# Altium PCB 多款天线pcb.PcbDoc
Units mil, origin at the board's own origin, x right, y up, seen from the top; angles counter-clockwise.
Board outline 6000 x 4000 mil, 4 copper layers (Top Layer, Mid-Layer 1, Mid-Layer 2, Bottom Layer); 18 components, 0 nets, 39 pads, 60 vias.
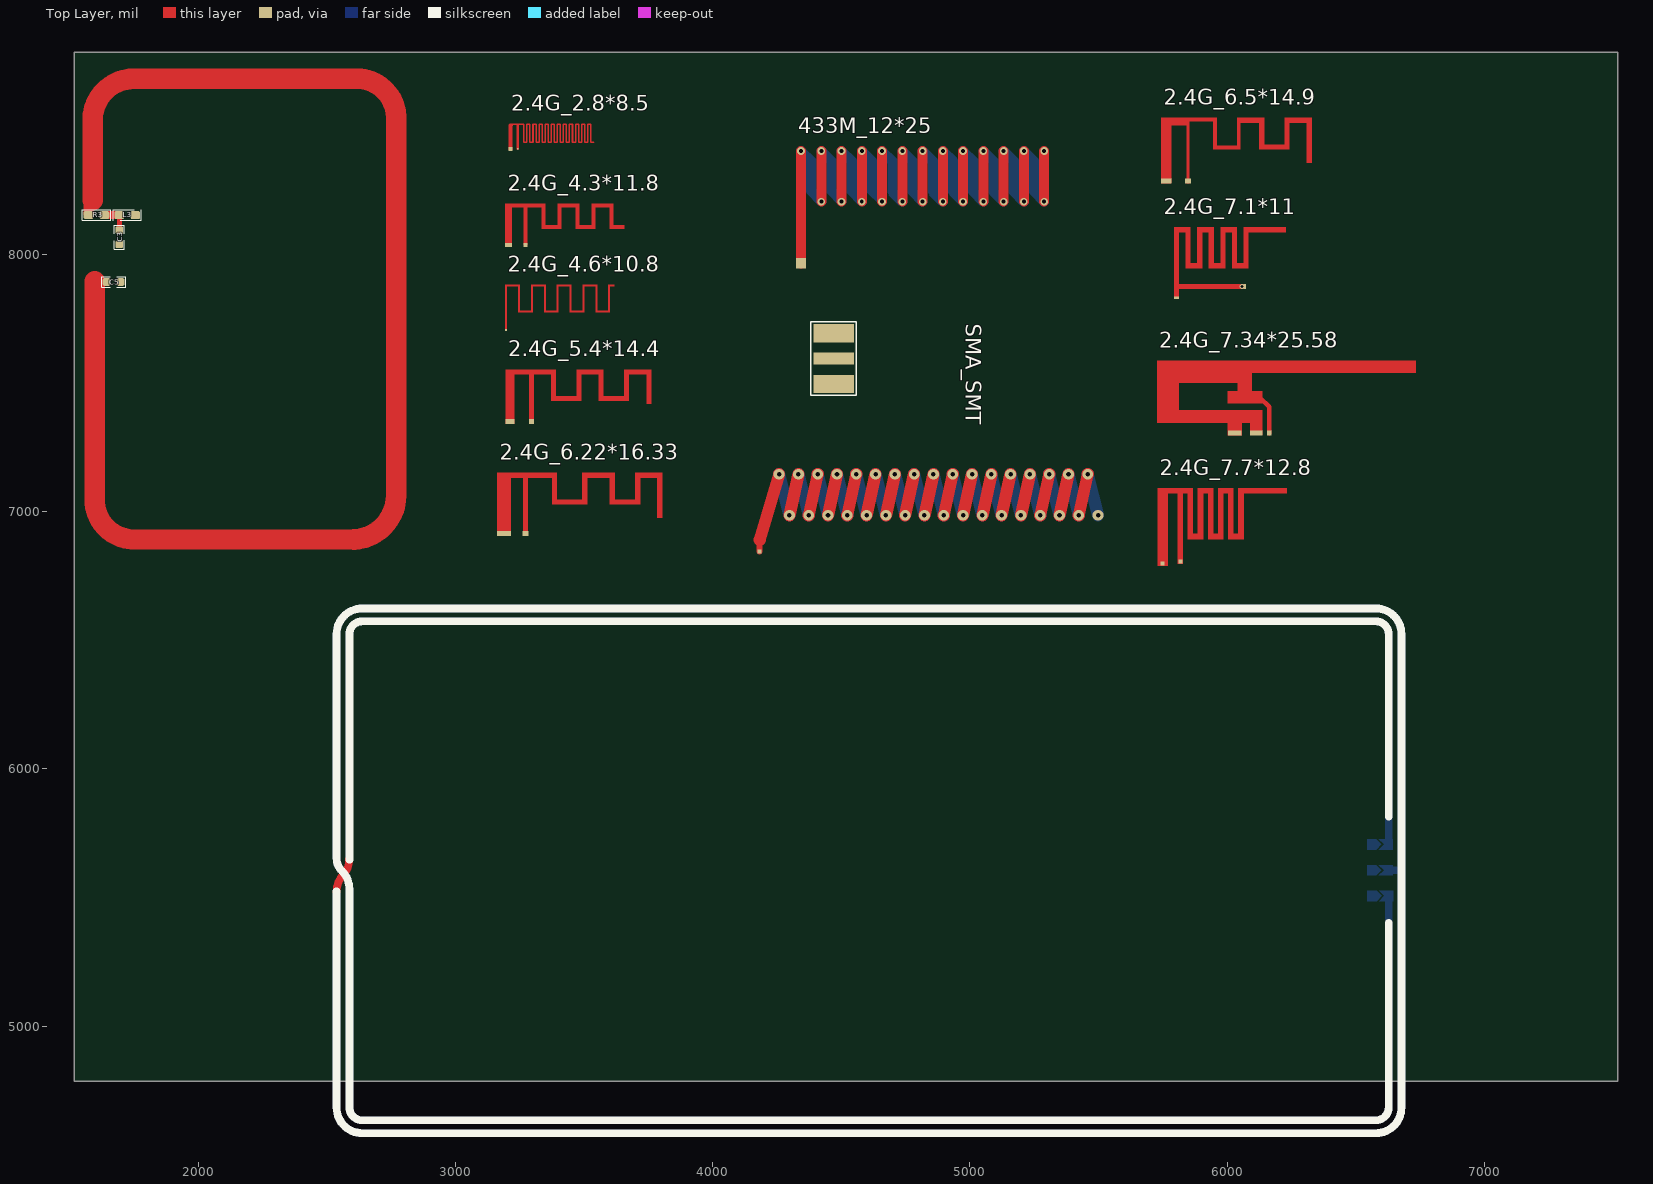
[diagram p0: Top Layer view]
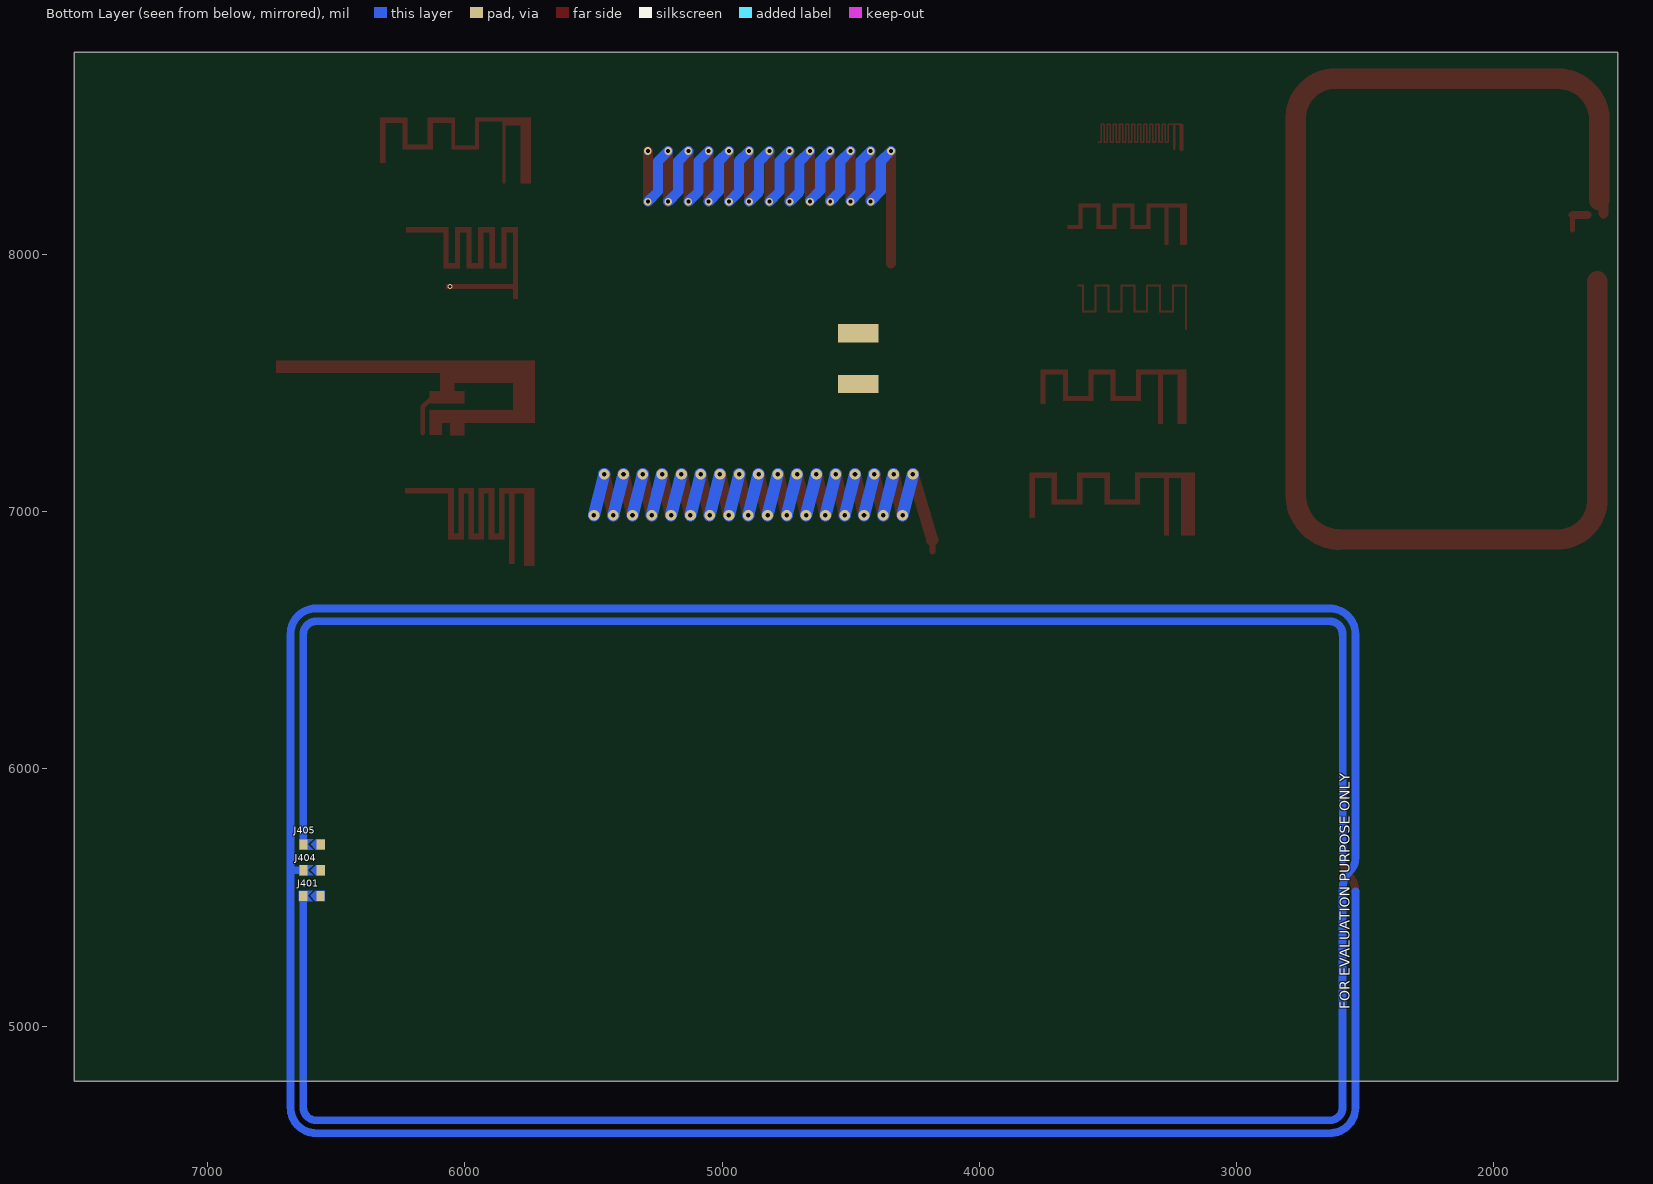
[diagram p1: Bottom Layer view, seen from below]

## Layer stack, top to bottom
Top Layer: signal copper 1.4
Dielectric: dielectric 12.6, FR-4, Dk 4.8
Mid-Layer 1: signal copper 1.4
Dielectric: dielectric 12.6, FR-4, Dk 4.8
Mid-Layer 2: signal copper 1.4
Dielectric: dielectric 12.6, FR-4, Dk 4.8
Bottom Layer: signal copper 1.4

## Board outline
1518.27,4785.59 7518.27,4785.59 7518.27,8785.59 1518.27,8785.59

## Design rules (kind name [scope] priority, off if disabled: settings)
Clearance [All] p1: gap=10
PolygonConnect [All] p1: connectstyle=Relief reliefconductorwidth=10 reliefentries=4 polygonreliefangle="90 Angle" airgapwidth=10
RoutingVias [All] p1: holewidth=28 width=50 viastyle="Through Hole" minholewidth=28 minwidth=50 maxholewidth=28 maxwidth=50
SolderMaskExpansion [All] p1: expansion=4
Width [All] p1: maxlimit=10 minlimit=10 preferedwidth=10
28 further rules are at their usual default settings.

## Components (designator, comment, footprint, x,y, rotation, side; value= is the part's Value field where it differs from the comment)
2.4G_2.8*8.5 "Comment" 2.4G_2.8x8.5 3242.4,8410.59 r0 top
2.4G_4.3*11.8 "Comment" 2.4G_4.3x11.8(TEST) 3272.4,8035.59 r0 top
2.4G_4.6*10.8 "Comment" 2.4G_4.6X10.8(TEST) 3197.4,7705.59 r0 top
2.4G_5.4*14.4 "Comment" 2.4G_5.4X14.4 3212.4,7350.59 r0 top
2.4G_6.5*14.9 "Comment" 2.4G_6.5X14.9 5763.27,8285.59 r0 top
2.4G_6.22*16.33 "Comment" 2.4G_6.22X16.33 3272.4,6915.59 r0 top
2.4G_7.1*11 "Comment" 2.4G_7.1X11 5803.27,7830.59 r0 top
2.4G_7.7*12.8 "Comment" 2.4G_7.7X12.8 5818.27,6805.59 r0 top
2.4G_7.34*25.58 "Comment" 2.4G_7.34X25.58 6163.27,7305.59 r0 top
433M_12*25 "Comment" 433M_12X25 4343.27,7965.59 r0 top
C3 "NC" 0603C 1693.27,8066.59 r270 top
C5 "NC" 0603C 1671.27,7892.59 r0 top
J401 "closed 0R" JP2_SMD_CLOSED 6594.75,5506 r0 bottom net-tie
J404 "closed 0R" JP2_SMD_CLOSED 6594,5606 r0 bottom net-tie
J405 "closed 0R" JP2_SMD_CLOSED 6593.75,5706 r0 bottom net-tie
L3 "4.7nH" 0603L 1724.27,8152.59 r0 top
R3 "10R" 0603R 1604.27,8152.59 r0 top
SMA_SMT "Comment" SMA-SMD 4470,7595 r270 top

## Footprints (in the part's own frame and the unit in brackets; to place one, negate y for a bottom-side part, rotate by r counter-clockwise, add the part's x,y. Pads: shape width x height; smd on the part's side, far side on the other; paste and mask are expansions set on the pad)
2.4G_2.8x8.5 [mm]
  rect 0.15x0.15 smd paste-1: 1(0,0)
  rect 0.4x0.4 smd paste-1: 2(-0.7,-0.03)
  Top Layer region: -0.501,2.401 -0.553,2.401 -0.553,2.257 -0.501,2.257
  Top Layer lines w0.15: -0.7,2.42 0,2.42 0.6,2.42 0.6,0.62 0.9,0.62 0.9,2.42 1.2,2.42 1.2,0.62 1.5,0.62 1.5,2.42 1.8,2.42 1.8,0.62 2.1,0.62 2.1,2.42 2.4,2.42 2.4,0.62 2.7,0.62 2.7,2.42 3,2.42 3,0.62 3.3,0.62 3.3,2.42 3.6,2.42 3.6,0.62 3.9,0.62 3.9,2.42 4.2,2.42 4.2,0.62 4.5,0.62 4.5,2.42 4.8,2.42 4.8,0.62 5.1,0.62 5.1,2.42 5.4,2.42 5.4,0.62 5.7,0.62 5.7,2.42 6,2.42 6,0.62 6.3,0.62 6.3,2.42 6.6,2.42 6.6,0.62 6.9,0.62 6.9,2.42 7.2,2.42 7.2,0.62 7.5,0.62
  Top Layer lines w0.25: 0,0 0,0.145 0,0.423 0,2.37
  Top Layer lines w0.4: -0.7,-0.03 -0.7,2.295
2.4G_4.3x11.8(TEST) [mm]
  rect 0.4x0.4 smd paste-2: 1(0,0)
  rect 0.72x0.4 smd paste-2: 2(-1.68,0)
  Top Layer region: 8.28,1.608 9.751,1.608 9.751,2.008 8.28,2.008
  Top Layer region: 3.16,3.72 5.32,3.72 5.32,4.12 3.16,4.12
  Top Layer region: 3.16,1.608 3.56,1.608 3.56,4.12 3.16,4.12
  Top Layer region: 1.56,1.608 3.56,1.608 3.56,2.008 1.56,2.008
  Top Layer region: -0.2,0 0.2,0 0.2,3.92 -0.2,3.92
  Top Layer region: -2.04,3.72 1.96,3.72 1.96,4.12 -2.04,4.12
  Top Layer region: -2.04,0 -1.32,0 -1.32,3.72 -2.04,3.72
  Top Layer region: 1.56,1.608 1.96,1.608 1.96,4.12 1.56,4.12
  Top Layer region: 4.92,1.608 5.32,1.608 5.32,4.12 4.92,4.12
  Top Layer region: 4.92,1.608 6.92,1.608 6.92,2.008 4.92,2.008
  Top Layer region: 6.52,1.608 6.92,1.608 6.92,4.12 6.52,4.12
  Top Layer region: 6.52,3.72 8.68,3.72 8.68,4.12 6.52,4.12
  Top Layer region: 8.28,1.608 8.68,1.608 8.68,4.12 8.28,4.12
2.4G_4.6X10.8(TEST) [mm]
  rect 0.2x0.2 smd paste-2: 1(0,0)
  Top Layer region: 0.101,0 0.101,4.5 -0.099,4.5 -0.099,0
  Top Layer region: -0.099,4.3 1.371,4.3 1.371,4.5 -0.099,4.5
  Top Layer region: 1.371,1.72 1.371,4.5 1.171,4.5 1.171,1.72
  Top Layer region: 1.171,1.72 2.641,1.72 2.641,1.92 1.171,1.92
  Top Layer region: 2.641,1.72 2.641,4.5 2.441,4.5 2.441,1.72
  Top Layer region: 2.441,4.3 3.911,4.3 3.911,4.5 2.441,4.5
  Top Layer region: 3.911,1.72 3.911,4.5 3.711,4.5 3.711,1.72
  Top Layer region: 3.711,1.72 5.181,1.72 5.181,1.92 3.711,1.92
  Top Layer region: 5.181,1.72 5.181,4.5 4.981,4.5 4.981,1.72
  Top Layer region: 4.981,4.3 6.451,4.3 6.451,4.5 4.981,4.5
  Top Layer region: 6.451,1.72 6.451,4.5 6.251,4.5 6.251,1.72
  Top Layer region: 6.251,1.72 7.721,1.72 7.721,1.92 6.251,1.92
  Top Layer region: 7.721,1.72 7.721,4.5 7.521,4.5 7.521,1.72
  Top Layer region: 7.521,4.3 8.991,4.3 8.991,4.5 7.521,4.5
  Top Layer region: 8.991,1.72 8.991,4.5 8.791,4.5 8.791,1.72
  Top Layer region: 8.791,1.72 10.261,1.72 10.261,1.92 8.791,1.92
  Top Layer region: 10.261,1.72 10.261,4.5 10.061,4.5 10.061,1.72
  Top Layer region: 10.061,4.3 10.698,4.3 10.698,4.5 10.061,4.5
2.4G_5.4X14.4 [mm]
  rect 0.5x0.5 smd paste-2: 1(2.097,-0.004)
  rect 0.9x0.5 smd paste-2: 2(0,0)
  Top Layer region: -0.452,4.651 4.547,4.651 4.547,5.151 -0.452,5.151
  Top Layer region: 1.847,-0.25 2.347,-0.25 2.347,5.076 1.847,5.076
  Top Layer region: 4.047,2.01 4.547,2.01 4.547,5.076 4.047,5.076
  Top Layer region: 4.128,2.01 6.922,2.01 6.922,2.51 4.128,2.51
  Top Layer region: 6.547,2.01 7.047,2.01 7.047,5.076 6.547,5.076
  Top Layer region: 6.547,4.651 9.247,4.651 9.247,5.151 6.547,5.151
  Top Layer region: 8.747,2.01 9.247,2.01 9.247,5.076 8.747,5.076
  Top Layer region: 8.827,2.01 11.621,2.01 11.621,2.51 8.827,2.51
  Top Layer region: 11.247,2.01 11.747,2.01 11.747,5.076 11.247,5.076
  Top Layer region: 11.247,4.651 13.947,4.651 13.947,5.151 11.247,5.151
  Top Layer region: 13.447,1.71 13.947,1.71 13.947,5.076 13.447,5.076
  Top Layer region: -0.452,-0.25 0.448,-0.25 0.448,5.076 -0.452,5.076
2.4G_6.5X14.9 [mm]
  rect 0.6x0.5 smd paste-2: 1(2.127,0)
  rect 1.017x0.5 smd paste-2: 2(0,0)
  Top Layer region: 11.665,5.729 14.39,5.729 14.39,6.255 11.665,6.255
  Top Layer region: 11.665,3.09 12.188,3.09 12.188,6.255 11.665,6.255
  Top Layer region: 6.969,5.729 9.689,5.729 9.689,6.255 6.969,6.255
  Top Layer region: 6.969,3.09 7.324,3.09 7.324,6.255 6.969,6.255
  Top Layer region: 4.99,3.09 7.324,3.09 7.324,3.515 4.99,3.515
  Top Layer region: -0.508,-0.252 0.508,-0.252 0.508,6.255 -0.508,6.255
  Top Layer region: 1.975,-0.245 2.28,-0.245 2.28,6.255 1.975,6.255
  Top Layer region: -0.508,5.447 2.28,5.447 2.28,6.255 -0.508,6.255
  Top Layer region: 2.28,5.875 4.99,5.875 4.99,6.255 2.28,6.255
  Top Layer region: 4.635,3.09 4.99,3.09 4.99,6.255 4.635,6.255
  Top Layer region: 9.163,3.09 9.689,3.09 9.689,6.255 9.163,6.255
  Top Layer region: 9.163,3.09 12.188,3.09 12.188,3.616 9.163,3.616
  Top Layer region: 13.865,1.79 14.39,1.79 14.39,6.255 13.865,6.255
2.4G_6.22X16.33 [mm]
  rect 0.6x0.5 smd paste-2: 1(0,0)
  rect 1.354x0.5 smd paste-2: 2(-2.117,0)
  Top Layer region: 13.007,1.535 13.533,1.535 13.533,6.001 13.007,6.001
  Top Layer region: 10.808,5.475 13.533,5.475 13.533,6.001 10.808,6.001
  Top Layer region: 10.808,2.836 11.331,2.836 11.331,6.001 10.808,6.001
  Top Layer region: 8.306,2.836 11.331,2.836 11.331,3.362 8.306,3.362
  Top Layer region: 8.306,2.836 8.832,2.836 8.832,6.001 8.306,6.001
  Top Layer region: 5.598,5.475 8.832,5.475 8.832,6.001 5.598,6.001
  Top Layer region: 5.598,2.836 6.124,2.836 6.124,6.001 5.598,6.001
  Top Layer region: 2.591,2.836 6.124,2.836 6.124,3.362 2.591,3.362
  Top Layer region: 2.591,2.836 3.117,2.836 3.117,6.001 2.591,6.001
  Top Layer region: 0.225,5.475 3.117,5.475 3.117,6.001 0.225,6.001
  Top Layer region: -2.794,5.475 -0.006,5.475 -0.006,6.001 -2.794,6.001
  Top Layer region: -2.794,-0.219 -1.44,-0.219 -1.44,6.001 -2.794,6.001
  Top Layer region: -0.225,-0.238 0.225,-0.238 0.225,6.001 -0.225,6.001
2.4G_7.1X11 [mil]
  rect 20x10 smd paste-20 mask+2: 1(0,0)
  rect 10x20 smd paste-20 mask+2: 2(265,45)
  Top Layer region: -10,35 270,35 270,55 -10,55
  Top Layer region: 260,255 425,255 425,275 260,275
  Top Layer region: 260,115 280,115 280,275 260,275
  Top Layer region: 215,115 235,115 235,275 215,275
  Top Layer region: 215,115 280,115 280,135 215,135
  Top Layer region: 125,115 190,115 190,135 125,135
  Top Layer region: 85,255 145,255 145,275 85,275
  Top Layer region: 125,115 145,115 145,275 125,275
  Top Layer region: 170,115 190,115 190,275 170,275
  Top Layer region: 170,255 235,255 235,275 170,275
  Top Layer region: 80,115 100,115 100,275 80,275
  Top Layer region: 35,115 100,115 100,135 35,135
  Top Layer region: 35,115 55,115 55,265 35,265
  Top Layer region: -10,255 55,255 55,275 -10,275
  Top Layer region: -10,-5 10,-5 10,275 -10,275
2.4G_7.7X12.8 [mm]
  rect 0.4x0.4 smd paste-2: 1(0,0) 2(-1.759,-0.18)
  Top Layer region: -2.276,-0.435 -1.221,-0.435 -1.221,7.259 -2.276,7.259
  Top Layer region: -2.276,6.706 1.258,6.706 1.258,7.259 -2.276,7.259
  Top Layer region: -0.277,-0.245 0.277,-0.245 0.277,6.751 -0.277,6.751
  Top Layer region: 0.703,2.206 1.258,2.206 1.258,7.259 0.703,7.259
  Top Layer region: 0.703,2.206 2.258,2.206 2.258,2.761 0.703,2.761
  Top Layer region: 1.704,2.206 2.258,2.206 2.258,7.259 1.704,7.259
  Top Layer region: 1.704,6.704 3.259,6.704 3.259,7.259 1.704,7.259
  Top Layer region: 2.705,2.206 3.259,2.206 3.259,7.259 2.705,7.259
  Top Layer region: 2.705,2.206 4.257,2.206 4.257,2.761 2.705,2.761
  Top Layer region: 3.703,6.704 5.258,6.704 5.258,7.259 3.703,7.259
  Top Layer region: 4.704,2.206 5.258,2.206 5.258,7.259 4.704,7.259
  Top Layer region: 4.704,2.206 6.259,2.206 6.259,2.761 4.704,2.761
  Top Layer region: 5.705,2.206 6.259,2.206 6.259,7.259 5.705,7.259
  Top Layer region: 3.703,2.206 4.257,2.206 4.257,7.259 3.703,7.259
  Top Layer region: 5.705,6.704 10.529,6.704 10.529,7.259 5.705,7.259
2.4G_7.34X25.58 [mm]
  rect 0.46x0.46 smd paste-2: 1(0,0)
  rect 1.35x0.46 smd paste-2: 2(-3.4,0)
  rect 1.2x0.46 smd paste-2: 2(-1.28,0)
  Top Layer region: -4.11,2.92 -0.68,2.92 -0.68,4.13 -4.11,4.13
  Top Layer region: -11.09,0.97 -8.91,0.97 -8.91,7.14 -11.09,7.14
  Top Layer region: -1.882,-0.2 -0.68,-0.2 -0.68,1.827 -1.882,1.827
  Top Layer region: -4.11,-0.227 -2.683,-0.227 -2.683,1.722 -4.11,1.722
  Top Layer region: -11.09,0.97 -0.68,0.97 -0.68,2.26 -11.09,2.26
  Top Layer region: -11.09,4.93 -1.682,4.93 -1.682,7.14 -11.09,7.14
  Top Layer region: -3.11,3.989 -1.68,3.989 -1.68,6.884 -3.11,6.884
  Top Layer region: -11.09,5.93 14.49,5.93 14.49,7.14 -11.09,7.14
  Top Layer lines w0.46: -0.908,3.48 0,2.572 0,0
433M_12X25 [mm]
  rect 1x1 smd paste-2: 1(0,0)
  Top Layer lines w0.254: 0,11.074 0.008,11.082
  Top Layer lines w1: 0,0 0,11.074 ; 2.009,6.083 2.009,11.082 ; 4.008,6.083 4.008,11.082 ; 6.007,6.083 6.01,6.083 6.01,10.373 6.01,11.082 ; 8.009,6.083 8.009,11.082 ; 10.008,6.083 10.008,11.082 ; 12.009,6.083 12.009,11.082 ; 14.008,6.083 14.008,11.082 ; 16.007,6.083 16.007,11.082 ; 18.009,6.083 18.009,11.082 ; 20.008,6.083 20.008,11.082 ; 22.009,6.083 22.009,11.082 ; 24.008,6.083 24.008,11.082
  Bottom Layer lines w0.254: 1.875,6.083 2.009,6.083 ; 2.009,11.082 2.149,11.082 ; 3.919,6.083 4.008,6.083 ; 6.007,6.083 6.007,6.129 ; 8.009,6.083 8.009,6.19
  Bottom Layer lines w1: 0.008,11.082 1.008,10.081 ; 1.013,7.122 2.004,6.129 ; 1.016,7.122 1.016,10.081 ; 2.009,11.082 3.01,10.081 ; 3.015,7.122 4.006,6.129 ; 3.018,7.122 3.018,10.081 ; 4.008,11.082 5.009,10.081 5.016,10.081 5.016,7.122 6.007,6.129 ; 6.01,11.082 6.993,10.099 6.993,7.206 8.009,6.19 ; 8.009,11.082 9.022,10.069 9.022,7.069 10.008,6.083 ; 10.008,11.082 11.016,10.074 11.016,7.074 12.009,6.083 ; 12.009,11.082 13.018,10.071 13.018,7.071 14.008,6.083 ; 14.008,11.082 15.022,10.069 15.022,7.069 16.007,6.083 ; 16.007,11.082 17.008,10.084 17.008,7.082 18.009,6.083 ; 18.009,11.082 18.997,10.091 18.997,7.092 20.008,6.083 ; 20.008,11.082 21.011,10.081 21.011,7.079 22.009,6.083 ; 22.009,11.082 23.01,10.081 23.01,7.082 24.008,6.083
0603C [mil] "Capacitor"
  rrect50% 30x30 smd: 1(-27.5,0) 2(27.5,0)
  silkscreen extent -47,-20 47,20, body extent -35,-15 35,15, height 33
0603L [mm] "WE-CBF SMD EMI Suppression Ferrite Bead"
  rrect50% 0.96x0.8 smd: 1(-0.79,0) 2(0.79,0)
  silkscreen extent -1.4,-0.53 1.4,0.53, body extent -0.89,-0.38 0.89,0.38, height 0.8
0603R [mm]
  rrect50% 0.96x0.8 smd: 1(-0.79,0) 2(0.79,0)
  silkscreen extent -1.4,-0.53 1.4,0.53, body extent -0.89,-0.4 0.89,0.4, height 0.6
JP2_SMD_CLOSED [mil]
  rect 32x40 smd: 1(-33.75,0) 2(33.75,0)
  Top Layer region: -50,-20 -50,20 -14,20 6,0 -14,-20
  Top Layer region: -3.75,20 16.25,0 -3.75,-20 50,-20 50,20
SMA-SMD [mm]
  rect 1.2x4 smd paste-4: 1(0,0)
  rect 1.8x4 smd paste-4: 2(-2.5,0) 3(2.5,0)
  rect 1.8x4 smd far side paste-4: 4(-2.5,0) 5(2.5,0)
  silkscreen extent -3.63,-2.24 3.64,2.22, body extent -3.24,-1.72 3.26,11.78, height 3.75

## Part data
2.4G_2.8*8.5 2.4G_4.3*11.8 2.4G_4.6*10.8 2.4G_5.4*14.4 2.4G_6.5*14.9 2.4G_6.22*16.33 2.4G_7.1*11 2.4G_7.7*12.8 2.4G_7.34*25.58 433M_12*25 SMA_SMT: library part 1404000342
C3 C5: library part C
J401 J404 J405: library part solder_jumper_closed, "0R"
L3: library part L, "Inductor"
R3: library part R, "RES"

## Free pads (board coordinates)
  rect 15x15 smd: 1(4182.28,6844.8)

## Via types
v1: diameter 42, hole 17.72, Top Layer to Bottom Layer, 34 vias
v2: diameter 29.92, hole 15, Top Layer to Bottom Layer, 25 vias
v3: diameter 19.68, hole 11.81, Top Layer to Bottom Layer, 1 vias

## Nets (pads, with @x,y where several pads share a name; then routed paths per layer and width w, separated by ;. In a path a pad name is that pad's centre, name@x,y a point inside that pad or via, vN(x,y) a via of type N, cw(c..) or ccw(c..) an arc to the next point about the centre after c; other vN are vias at no path point)
pads on no net: 2.4G_2.8*8.5.1 2.4G_2.8*8.5.2 2.4G_4.3*11.8.1 2.4G_4.3*11.8.2 2.4G_4.6*10.8.1 2.4G_5.4*14.4.1 2.4G_5.4*14.4.2 2.4G_6.5*14.9.1 2.4G_6.5*14.9.2 2.4G_6.22*16.33.1 2.4G_6.22*16.33.2 2.4G_7.1*11.1 2.4G_7.1*11.2 2.4G_7.7*12.8.1 2.4G_7.7*12.8.2 2.4G_7.34*25.58.1 2.4G_7.34*25.58.2 433M_12*25.1 C3.1 C3.2 C5.1 C5.2 J401.1 J401.2 J404.1 J404.2 J405.1 J405.2 L3.1 L3.2 R3.1 R3.2 SMA_SMT.1 SMA_SMT.2 SMA_SMT.3 SMA_SMT.4 SMA_SMT.5
copper on no net: | length 36229.2
  Top Layer w19.68: 1693.27,8094.09 1693.27,8152.49
  Top Layer w23.62: 4182.28,6844.8 4182.75,6866.6
  Top Layer w30: 2538,5522 cw(c2638,5522) 2567.29,5592.71 ; 2565.78,5590.95 ccw(c2506,5645) 2586.5,5648.93
  Top Layer w31.5: 1635.37,8152.59 1693.16,8152.59
  Top Layer w39.37: 1573.17,8158.59 1573.17,8194.49
  Top Layer w47.24: 4183.27,6890.59 v1(4258.27,7145.59) ; v1(4298.27,6985.59) v1(4333.27,7145.59) ; v1(4373.27,6985.59) v1(4408.27,7145.59) ; v1(4448.27,6985.59) v1(4483.27,7145.59) ; v1(4523.27,6985.59) v1(4558.27,7145.59) ; v1(4598.27,6985.59) v1(4633.27,7145.59) ; v1(4673.27,6985.59) v1(4708.27,7145.59) ; v1(4748.27,6985.59) v1(4783.27,7145.59) ; v1(4823.27,6985.59) v1(4858.27,7145.59) ; v1(4898.27,6985.59) v1(4933.27,7145.59) ; v1(4973.27,6985.59) v1(5008.27,7145.59) ; v1(5048.27,6985.59) v1(5083.27,7145.59) ; v1(5123.27,6985.59) v1(5158.27,7145.59) ; v1(5198.27,6985.59) v1(5233.27,7145.59) ; v1(5273.27,6985.59) v1(5308.27,7145.59) ; v1(5348.27,6985.59) v1(5383.27,7145.59) ; v1(5423.27,6985.59) v1(5458.27,7145.59)
  Top Layer w78.74: 1597.27,7043.59 ccw(c1752.27,7046.59) 1755.27,6891.59 2607.27,6891.59
  Top Layer w80: 1589.27,8210.59 1589.27,8516.59 cw(c1750.77,8521.09) 1746.27,8682.59 2632.27,8682.59 cw(c2614.77,8528.09) 2769.27,8510.59 2769.27,7074.59 cw(c2596.77,7064.09) 2607.27,6891.59 ; 1597.27,7043.59 1597.27,7895.59
  Bottom Layer w30: 2537.9,5523.72 2537.9,4683.72 ; 2586.8,5646.2 2586.8,6522.74 ; 6627.75,5606 6677.9,5606 ; 6627.9,5505.5 6627.9,4683.72 ; 6627.9,5706 6627.9,6523.72 ; 2537.9,4683.72 ccw(c2637.9,4683.72) 2637.9,4583.72 ; 2537.9,4683.72 ccw(c2637.9,4683.72) 2637.9,4583.72 ; 2537.9,5653.01 ccw(c2608.61,5653.01) 2558.61,5603.01 ; 2537.9,5653.01 ccw(c2608.61,5653.01) 2558.61,5603.01 ; 2537.9,5653.01 2537.9,6523.72 ; 2537.9,6523.72 cw(c2637.9,6523.72) 2637.9,6623.72 ; 2537.9,6523.72 cw(c2637.9,6523.72) 2637.9,6623.72 ; 2558.61,5603.01 cw(c2487.9,5532.3) 2587.9,5532.3 ; 2558.61,5603.01 cw(c2487.9,5532.3) 2587.9,5532.3 ; 2587.9,4683.72 ccw(c2637.9,4683.72) 2637.9,4633.72 ; 2587.9,4683.72 ccw(c2637.9,4683.72) 2637.9,4633.72 ; 2587.9,4683.72 2587.9,5532.3 ; 2637.9,4583.72 6577.9,4583.72 ; 2637.9,4633.72 6577.9,4633.72 ; 2637.9,6573.72 ccw(c2637.9,6523.72) 2587.9,6523.72 cw(c2637.9,6523.72) 2637.9,6573.72 ; 2637.9,6573.72 6577.9,6573.72 ; 2637.9,6623.72 6577.9,6623.72 ; 6577.9,4583.72 ccw(c6577.9,4683.72) 6677.9,4683.72 ; 6577.9,4583.72 ccw(c6577.9,4683.72) 6677.9,4683.72 ; 6577.9,4633.72 ccw(c6577.9,4683.72) 6627.9,4683.72 ; 6577.9,4633.72 ccw(c6577.9,4683.72) 6627.9,4683.72 ; 6577.9,6573.72 cw(c6577.9,6523.72) 6627.9,6523.72 ; 6577.9,6573.72 cw(c6577.9,6523.72) 6627.9,6523.72 ; 6577.9,6623.72 cw(c6577.9,6523.72) 6677.9,6523.72 ; 6577.9,6623.72 cw(c6577.9,6523.72) 6677.9,6523.72 ; 6677.9,4683.72 6677.9,5606 ; 6677.9,5606 6677.9,6523.72
  Bottom Layer w47.24: v1(4258.27,7145.59) v1(4298.27,6985.59) ; v1(4333.27,7145.59) v1(4373.27,6985.59) ; v1(4408.27,7145.59) v1(4448.27,6985.59) ; v1(4483.27,7145.59) v1(4523.27,6985.59) ; v1(4558.27,7145.59) v1(4598.27,6985.59) ; v1(4633.27,7145.59) v1(4673.27,6985.59) ; v1(4708.27,7145.59) v1(4748.27,6985.59) ; v1(4783.27,7145.59) v1(4823.27,6985.59) ; v1(4858.27,7145.59) v1(4898.27,6985.59) ; v1(4933.27,7145.59) v1(4973.27,6985.59) ; v1(5008.27,7145.59) v1(5048.27,6985.59) ; v1(5083.27,7145.59) v1(5123.27,6985.59) ; v1(5158.27,7145.59) v1(5198.27,6985.59) ; v1(5233.27,7145.59) v1(5273.27,6985.59) ; v1(5308.27,7145.59) v1(5348.27,6985.59) ; v1(5383.27,7145.59) v1(5423.27,6985.59) ; v1(5458.27,7145.59) v1(5498.27,6985.59)
  other v2: 4422.37,8205.09 4501.07,8205.09 4579.77,8205.09 4658.57,8205.09 4737.27,8205.09 4816.07,8205.09 4894.77,8205.09 4973.47,8205.09 5052.27,8205.09 5130.97,8205.09 5209.77,8205.09 5288.47,8205.09 4343.57,8401.89 4422.37,8401.89 4501.07,8401.89 4579.87,8401.89 4658.57,8401.89 4737.27,8401.89 4816.07,8401.89 4894.77,8401.89 4973.47,8401.89 5052.27,8401.89 5130.97,8401.89 5209.77,8401.89 5288.47,8401.89
  other v3: 6058.27,7875.59

## Silkscreen, mask and mechanical layers (free items; w line width, h text height)
Top Overlay:
  lines w30: 2537.9,5523.72 2537.9,4683.72 ccw(c2637.9,4683.72) 2637.9,4583.72 6577.9,4583.72 ccw(c6577.9,4683.72) 6677.9,4683.72 6677.9,5603.72 6677.9,6523.72 ccw(c6577.9,6523.72) 6577.9,6623.72 2637.9,6623.72 ccw(c2637.9,6523.72) 2537.9,6523.72 2537.9,5653.01 ccw(c2608.61,5653.01) 2558.61,5603.01 cw(c2487.9,5532.3) 2587.9,5532.3 2587.9,4683.72 ccw(c2637.9,4683.72) 2637.9,4633.72 6577.9,4633.72 ccw(c6577.9,4683.72) 6627.9,4683.72 6627.9,5401.17 ; 2587.9,5646.2 2587.9,6523.72 cw(c2637.9,6523.72) 2637.9,6573.72 6577.9,6573.72 cw(c6577.9,6523.72) 6627.9,6523.72 6627.9,5813.72
Bottom Overlay:
  text "FOR EVALUATION PURPOSE ONLY" at 2559.81,5064.49 h39.37 r270